# Altium PCB PCB2.PcbDoc
Units mil, origin at the board's own origin, x right, y up, seen from the top; angles counter-clockwise.
Board outline 1660 x 3715 mil, 2 copper layers (Top Layer, Bottom Layer); 35 components, 49 nets, 166 pads, 51 vias.
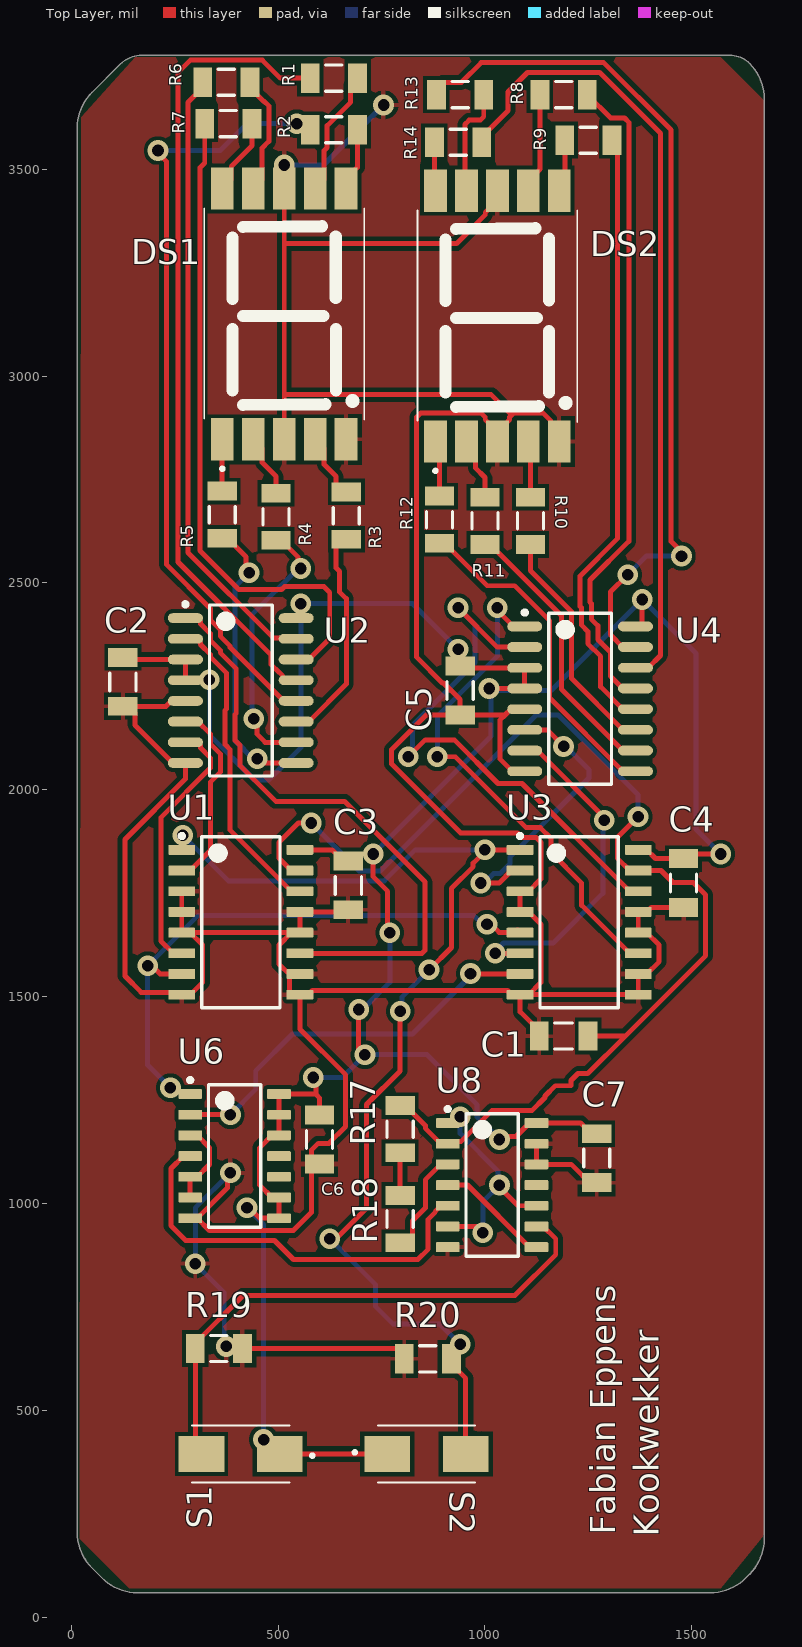
[diagram p0: Top Layer view]
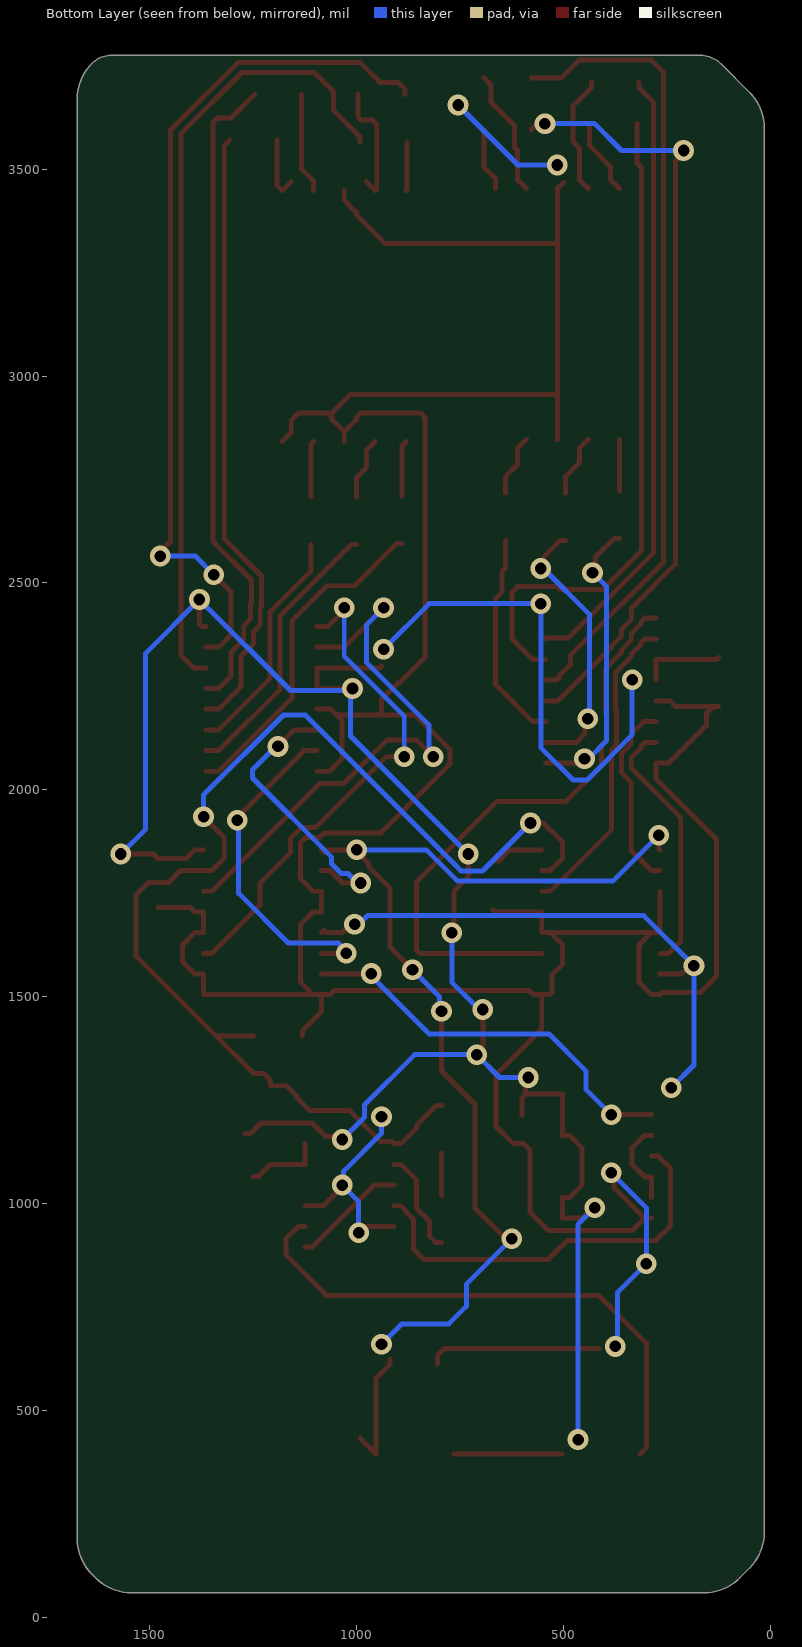
[diagram p1: Bottom Layer view, seen from below]

## Layer stack, top to bottom
Top Solder: solder mask 0.4, Solder Resist, Dk 3.5
Top Layer: signal copper 1.4
Dielectric 1: dielectric 12.6, FR-4, Dk 4.8
Bottom Layer: signal copper 1.4
Bottom Solder: solder mask 0.4, Solder Resist, Dk 3.5

## Board outline
15,205 ccw(c135.71,205) 50.36,119.64 74.64,95.36 ccw(c160,180.71) 160,60 1545,60 ccw(c1545,180.71) 1630.36,95.36 1639.64,104.64 ccw(c1554.29,190) 1675,190 1675,3670 ccw(c1554.29,3670) 1639.64,3755.36 ccw(c1592.22,3707.93) 1592.22,3775 170,3775 ccw(c170,3702.57) 118.79,3753.79 50.36,3685.36 ccw(c135.71,3600) 15,3600

## Design rules (kind name [scope] priority, off if disabled: settings)
Clearance [All] p1: gap=10 ignorepadtopadclearanceinfootprint=FALSE except(12: Arc-Arc Arc-Track Arc-SMDPad Arc-THPad Arc-Fill Arc-Poly Arc-Region Arc-Text Arc-Hole Track-Track Track-SMDPad Track-THPad Track-Fill Track-Poly Track-Region Track-Text Track-Hole)
PolygonConnect [All] p1: connectstyle=Relief reliefconductorwidth=10 reliefentries=4 polygonreliefangle="90 Angle" airgapwidth=10
RoutingVias [All] p1: holewidth=28 width=50 viastyle="Through Hole" minholewidth=28 minwidth=50 maxholewidth=28 maxwidth=50
SolderMaskExpansion [All] p1: expansion=4 istentingtop=FALSE
SupplyNets "Schematic Supply Nets_1" [InNet('Vdd')] p1: voltage=0.000
SupplyNets "Schematic Supply Nets" [InNet('GND')] p2: voltage=0.000
Width [All] p1: maxlimit=12 minlimit=12 preferedwidth=12 minimp=50.000000 maximp=50.000000 favimp=50.000000
30 further rules are at their usual default settings.

## Classes and differential pairs
component class Logic: C1 C3 C4 C6 C7 R17 R18 R19 R20 S1 S2 U1 U3 U6 U8
component class Display: C2 C5 DS1 DS2 R1 R2 R3 R4 R5 R6 R7 R8 R9 R10 R11 R12 R13 R14 U2 U4

## Components (designator, comment, footprint, x,y, rotation, side; value= is the part's Value field where it differs from the comment)
C1 "100µF" C1206 1190,1405 r180 top
C2 "100nF" C1206 125,2260.94 r90 top
C3 "100nF" C1206 670,1769.06 r270 top
C4 "100nF" C1206 1480,1775 r270 top
C5 "100nF" C1206 940,2240 r90 top
C6 "100nF" C1206 600,1155 r90 top
C7 "100nF" C1206 1270,1110 r90 top
DS1 "HDSM-433C" HDSM433C 515,3150 r0 top
DS2 "HDSM-433C" HDSM433C 1030,3145 r0 top
R1 "330" R1206 635,3720 r0 top
R2 "330" R1206 635,3595 r0 top
R3 "330" R1206 665,2662.91 r90 top
R4 "330" R1206 495,2660 r90 top
R5 "330" R1206 365,2665 r90 top
R6 "330" R1206 375,3710 r0 top
R7 "330" R1206 380,3610 r0 top
R8 "330" R1206 1190,3680 r180 top
R9 "330" R1206 1250,3570 r180 top
R10 "330" R1206 1110,2650 r90 top
R11 "330" R1206 1000,2650 r90 top
R12 "330" R1206 890,2652.91 r90 top
R13 "330" R1206 940,3680 r0 top
R14 "330" R1206 935,3565 r180 top
R17 "1K" R1206 795,1180 r90 top
R18 "1K" R1206 795,962.91 r90 top
R19 "10K" R1206 357.09,650 r0 top
R20 "10K" R1206 862.09,625 r180 top
S1 "START" 1478731 423.27,395 r180 top
S2 "PRESET" 1478731 845,395 r0 top
U1 "CD4510BNSR" NS0016A_N 410,1680 r0 top
U2 "CD4511BNSR" TI-NS16_N 410,2240 r0 top
U3 "CD4510BNSR" NS0016A_N 1227.72,1680 r0 top
U4 "CD4511BNSR" TI-NS16_N 1230,2220 r0 top
U6 "CD4001" D0014A_N 395,1115 r0 top
U8 "CD4093BM" D0014A_N 1017.28,1045 r0 top

## Footprints (in the part's own frame and the unit in brackets; to place one, negate y for a bottom-side part, rotate by r counter-clockwise, add the part's x,y. Pads: shape width x height; smd on the part's side, far side on the other; paste and mask are expansions set on the pad)
1478731 [mm]
  rect 2.8x2.2 smd: 1(-2.05,0) 2(2.75,0)
  silkscreen extent -4.15,-1.75 3.35,1.75, body extent -3.15,-1.75 3.65,1.75, height 5.2
C1206 [mm] "Chip Capacitor, Body 3.2x1.6mm, Height 1.7mm, IPC Medium Density"
  rect 1.15x1.8 smd: 1(-1.5,0) 2(1.5,0)
  silkscreen extent -0.55,-0.8 0.55,0.8, body extent -1.7,-0.9 1.7,0.9, height 1.7
D0014A_N [mm] "SOIC, 14-Leads, Body 8.75x4mm, Pitch 1.27mm, IPC Medium Density"
  rrect17% 1.45x0.6 smd: 1(-2.725,3.81) 2(-2.725,2.54) 3(-2.725,1.27) 4(-2.725,0) 5(-2.725,-1.27) 6(-2.725,-2.54) 7(-2.725,-3.81) 8(2.725,-3.81) 9(2.725,-2.54) 10(2.725,-1.27) 11(2.725,0) 12(2.725,1.27) 13(2.725,2.54) 14(2.725,3.81)
  silkscreen extent -2.85,-4.38 1.6,4.78, body extent -3.02,-4.32 3.02,4.32, height 1.59
HDSM433C [mm]
  rect 1.4x2.6 smd: 1(-3.8,-7.7) 2(-1.9,-7.7) 3(0,-7.7) 4(1.9,-7.7) 5(3.8,-7.7) 6(3.8,7.7) 7(1.9,7.7) 8(0,7.7) 9(-1.9,7.7) 10(-3.8,7.7)
  silkscreen extent -4.9,-9.6 4.9,6.5, body extent -4.95,-6.48 4.95,6.48, height 3.75
NS0016A_N [mm] "SOIC,16-Leads,Body 10.5x5.6mm,Pitch 1.27mm,IPC Medium Density"
  rrect17% 1.65x0.6 smd: 1(-3.625,4.445) 2(-3.625,3.175) 3(-3.625,1.905) 4(-3.625,0.635) 5(-3.625,-0.635) 6(-3.625,-1.905) 7(-3.625,-3.175) 8(-3.625,-4.445) 9(3.625,-4.445) 10(3.625,-3.175) 11(3.625,-1.905) 12(3.625,-0.635) 13(3.625,0.635) 14(3.625,1.905) 15(3.625,3.175) 16(3.625,4.445)
  silkscreen extent -3.75,-5.25 2.4,5.42, body extent -2.8,-5.25 2.8,5.25, height 2
R1206 [mm] "Chip Resistor, Body 3.2x1.6mm, IPC Medium Density"
  rect 1.15x1.8 smd: 1(-1.45,0) 2(1.45,0)
  silkscreen extent -0.5,-0.8 0.5,0.8, body extent -1.67,-0.87 1.67,0.87, height 0.75
TI-NS16_N [mm] "SOP, 16-Leads, Body 10.2x5.3mm, Pitch 1.27mm, IPC Medium Density"
  oval 2.15x0.6 smd: 1(-3.4,4.445) 2(-3.4,3.175) 3(-3.4,1.905) 4(-3.4,0.635) 5(-3.4,-0.635) 6(-3.4,-1.905) 7(-3.4,-3.175) 8(-3.4,-4.445) 9(3.4,-4.445) 10(3.4,-3.175) 11(3.4,-1.905) 12(3.4,-0.635) 13(3.4,0.635) 14(3.4,1.905) 15(3.4,3.175) 16(3.4,4.445)
  silkscreen extent -3.52,-5.25 1.92,5.42, body extent -2.8,-5.25 2.8,5.25, height 2

## Part data
C1 C2 C3 C4 C5 C6 C7: library part Capacitor_1206, "SMD Capacitor 1206", LatestRevisionDate=03-11-2016, LatestRevisionNote=Creation, PackageDescription="Chip Capacitor, Body 3.2x1.6mm, Height 1.7mm, IPC Medium Density", PackageReference=C1206, Published=03-11-2016, Publisher=Windesheim
DS1 DS2: "Display", Manufacturer_Name="Avago Technologies", Mouser Part Number=630-HDSM-433C, RS Part Number=1783057, Datasheet Link=https://docs.broadcom.com/docs/AV02-0708EN, Height=4mm, Manufacturer_Part_Number=HDSM-433C, Mouser Price/Stock=https://www.mouser.com/Search/Refine.aspx?Keyword=630-HDSM-433C, RS Price/Stock=http://uk.rs-online.com/web/p/products/1783057
R1 R2 R3 R4 R5 R6 R7 R8 R9 R10 R11 R12 R13 R14 R17 R18 R19 R20: library part Resistor_1206, "SMD Resistor 1206", LatestRevisionDate=03-11-2016, LatestRevisionNote=Creation, PackageDescription="Chip Resistor, Body 3.2x1.6mm, IPC Medium Density", PackageReference=R1206, Published=03-11-2016, Publisher=Windesheim
S1 S2: library part Switch, "Switch", Manufacturer_Name="TE Connectivity", Manufacturer_Part_Number=147873-1, Mouser Part Number=506-147873-1, Datasheet Link=https://componentsearchengine.com/Datasheets/1/147873-1.pdf, Height=5mm, Mouser Price/Stock=https://www.mouser.com/Search/Refine.aspx?Keyword=506-147873-1
U1 U3: "CMOS Presettable BCD Up/Down Counter, NS0016A, LARGE T&R", F @ Nom Voltage(Max)(Mhz)=8, Generic Part Number=CD4510B, ICC @ Nom Voltage(Max)(mA)=0.03, Manufacturer="Texas Instruments", Operating Temperature Range(C)="-55 to 125", Rating=Catalog, tpd @ Nom Voltage(Max)(ns)=200, Voltage(Nom)(V)=5,10,15, Bits(#)=4, DatasheetVersion=SCHS071B, Function=Counter, Input Type=CMOS, Inputs=1, Output Drive (IOL/IOH)(Max)(mA)=1.5/-1.5, Output Type=CMOS, PackageReference=NS0016A, Schmitt Trigger=No, Technology Family=CD4000, Type=Other, VCC(Max)(V)=18, VCC(Min)(V)=3
U2 U4: "CMOS BCD-to-7-Segment LED Latch / Decoder / Driver, 3 to 18 V, -55 to 125 degC, 16-pin SOP (NS16), Green (RoHS & no Sb/Br)", Manufacturer="Texas Instruments", Rating=Military, ComponentLink1Description="Manufacturer URL", ComponentLink1URL=http://www.ti.com/, ComponentLink2Description=Datasheet, ComponentLink2URL=http://www.ti.com/general/docs/lit/getliterature.tsp?genericPartNumber=CD4511B&fileType=pdf, ComponentLink3Description="Package Specification", ComponentLink3URL=http://www.ti.com/litv/pdf/msop002a, DatasheetVersion=SCHS072B, Eco-Plan="Green (RoHS & no Sb/Br)", Mounting Technology="Surface Mount", PackageDescription="16-Pin Plastic Small Outline, Body 10.20 x 5.30 mm, Pitch 1.27 mm", PackageReference=NS16, PackageVersion=4040062/C, PartNumber=CD4511BNSR, SubFamily="Discrete Segment LED Driver", Vin(Max)(V)=18, Vin(Min)(V)=3
U6: "CMOS Quad 2-Input NOR Schmitt Triggers, D0014A, TUBE", F @ Nom Voltage(Max)(Mhz)=8, Generic Part Number=CD4093B, ICC @ Nom Voltage(Max)(mA)=0.06, Manufacturer="Texas Instruments", Operating Temperature Range(C)="-55 to 125", Rating=Catalog, Voltage(Nom)(V)=10, Bits(#)=4, Code_JEDEC=MS-012, DatasheetVersion=SCHS115D, Input Type=CMOS, Output Drive (IOL/IOH)(Max)(mA)=1.5/-1.5, Output Type=CMOS, PackageReference=D0014A, Schmitt Trigger=Yes, Technology Family=CD4000, VCC(Max)(V)=18, VCC(Min)(V)=3
U8: "CMOS Quad 2-Input NAND Schmitt Triggers, D0014A, TUBE", F @ Nom Voltage(Max)(Mhz)=8, Generic Part Number=CD4093B, ICC @ Nom Voltage(Max)(mA)=0.06, Manufacturer="Texas Instruments", Operating Temperature Range(C)="-55 to 125", Rating=Catalog, Voltage(Nom)(V)=10, Bits(#)=4, Code_JEDEC=MS-012, DatasheetVersion=SCHS115D, Input Type=CMOS, Output Drive (IOL/IOH)(Max)(mA)=1.5/-1.5, Output Type=CMOS, PackageReference=D0014A, Schmitt Trigger=Yes, Technology Family=CD4000, VCC(Max)(V)=18, VCC(Min)(V)=3

## Via types
v1: diameter 50, hole 28, Top Layer to Bottom Layer, 51 vias

## Nets (pads, with @x,y where several pads share a name; then routed paths per layer and width w, separated by ;. In a path a pad name is that pad's centre, name@x,y a point inside that pad or via, vN(x,y) a via of type N, cw(c..) or ccw(c..) an arc to the next point about the centre after c; other vN are vias at no path point)
CarryM: U3.7 U6.2 | length 968.8
  Top Layer w12: U6.2 v1(385,1215) ; v1(965,1556) 965.5,1555.5 1084.5,1555.5 U3.7
  Bottom Layer w12: v1(385,1215) 446.14,1276.14 446.14,1321.14 535,1410 825,1410 965,1550 v1(965,1556)
CarryOUT: U1.7 U3.5 U6.1 | length 1379.6
  Top Layer w12: v1(185,1575) 195.28,1575 215.28,1555 U1.7 ; v1(1005,1675) 1015.28,1675 1034.52,1655.76 1074.14,1655.76 1079.19,1660.81 U3.5
  Bottom Layer w12: v1(240,1280) 185,1335 v1(185,1575) 306,1696 973.72,1696 994.72,1675 v1(1005,1675)
Clock: C1.1 R17.2 U1.15 U3.15 U8.2 | length 2896.4
  Top Layer w12: U1.15 532.05,1805 502.24,1834.81 502.24,1873.09 549.15,1920 v1@565,1920 ; R17.2 807.8,1237.09 855.94,1188.94 855.94,1182.32 893.27,1145 U8.2 915.81,1150.81 942.75,1150.81 1016.75,1224.81 1113.34,1224.81 1145.05,1256.52 1145.05,1260.05 1170,1285 1208.11,1285 1208.11,1297.8 1224.75,1314.43 1248.44,1314.43 1339,1405 ; C1.1 1339,1405 ; v1(1370,1935) 1319.95,1884.95 1319.95,1834.81 1349.76,1805 U3.15 1425.53,1805 1454.41,1776.12 1503.35,1776.12 1533.43,1746.04 1533.43,1599.43 1339,1405
  Bottom Layer w12: v1(580,1920) 696,1804 746.98,1804 1123.98,2181 1176.98,2181 1370,1987.98 v1(1370,1935)
GND: C1.2 C2.1 C3.2 C4.2 C5.1 C6.1 C7.1 DS1.3 DS1.5 DS1.8 DS2.3 DS2.5 DS2.8 R19.2 R20.2 U1.3 U1.4 U1.5 U1.8 U1.9 U1.10 U1.12 U1.13 U2.5 U2.8 U3.3 U3.4 U3.8 U3.9 U3.10 U3.12 U3.13 U4.5 U4.8 U6.7 U8.7 U8.12 U8.13 | length 10342.3
  Top Layer w12: C2.1 C2.1@137.8,2201.89 ; U1.3 U1.4 U1.5 U1.5@287.95,1655 ; U2.5 242.48,2215 229.37,2201.89 C2.1@137.8,2201.89 ; U6.7 U6.7@304.45,965 ; v1(385,1075) 377.73,1067.73 377.73,1038.28 U6.7@304.45,965 ; R19.2 788.36,650 805,633.36 R20.2 R20.2@805,612.2 ; DS1.8@499.95,3468.2 DS1.8 515,3320 ; DS1.3 515,2955 ; C3.2 665,1705 U1.13 U1.12 U1.12@532.05,1655 ; DS2.3 DS2.3@1030,2865.47 ; DS2.8 1030,3424.53 1000.76,3395.28 1000.76,3389.51 931.24,3320 515,3320 ; U4.8 1065.63,2045 1035.82,2074.81 1035.82,2168.33 1048.43,2180.94 ; U4.5 1062.48,2195 1048.43,2180.94 ; U8.13 U8.12 1208.15,1095 1237.2,1065.94 C7.1@1250,1065.94 ; C1.2 1130.94,1417.8 1085,1463.74 U3.8 ; DS2.5 1158.05,2863.41 1158.05,2892.8 1139.82,2911.03 1069.79,2911.03 1064.52,2905.76 ; C4.2 1402.05,1715.94 1391.1,1705 U3.13 U3.12 1391.1,1655 1420.91,1625.19 1420.91,1584.81 1391.1,1555 U3.10 U3.9 U3.8@1105.67,1505 ; C2.1@137.8,2201.89 154.43,2185.25 154.43,2156.2 245.63,2065 U2.8 276.14,2026.27 130,1880.13 130,1550 169.19,1510.81 261.47,1510.81 U1.8 287.95,1505 317.76,1534.81 317.76,1625.19 U1.5@287.95,1655 ; U1.5@287.95,1655 U1.12@532.05,1655 ; U6.7@304.45,965 334.26,935.19 537.11,935.19 580.57,978.65 580.57,1129.31 597.2,1145.94 622.8,1145.94 663.43,1186.58 663.43,1311.22 552.72,1421.93 U1.9 ; 515,2955 1015.28,2955 1064.52,2905.76 ; 515,2955 515,3320 ; U1.12@532.05,1655 502.24,1625.19 502.24,1578.95 528.24,1552.94 528.24,1510.81 534.06,1505 U1.9 ; U1.9 573.39,1505 583.39,1515 1054.33,1515 1064.33,1505 U3.8 ; C5.1 857.96,2180.94 774,2096.98 774,2063.02 941.02,1896 1078.63,1896 1089.82,1884.81 1123.76,1884.81 1135.48,1873.09 1135.48,1784.81 1105.67,1755 U3.3 U3.4 1105.67,1705 1135.48,1675.19 1135.48,1534.81 U3.8@1105.67,1505 ; C5.1 940,2218.42 900,2258.42 897.11,2258.42 834.83,2320.69 834.83,2900.49 845.38,2911.03 990.21,2911.03 1000.76,2900.49 1000.76,2894.72 DS2.3@1030,2865.47 ; C5.1 1048.43,2180.94 ; DS2.3@1030,2865.47 1059.24,2894.72 1059.24,2900.49 1064.52,2905.76 ; U3.8 U3.8@1105.67,1505
  Bottom Layer w12: v1(375,655) 370,660 370,785 v1(300,855) 300,990 v1(385,1075) ; v1(515,3510) 610,3510 v1(755,3655) 744.72,3655 v1@742.22,3652.5
NetDS1_1: DS1.1 R5.2 | length 124.9
  Top Layer w12: R5.2 365,2846.46 DS1.1
NetDS1_2: DS1.2 R4.2 | length 152.5
  Top Layer w12: DS1.2 461.76,2825.29 461.76,2790.97 495,2757.72 R4.2
NetDS1_4: DS1.4 R3.2 | length 150.6
  Top Layer w12: DS1.4 611.36,2825.29 611.36,2786.36 640,2757.72 R3.2@640,2717.09
NetDS1_6: DS1.6 R2.2 | length 153.2
  Top Layer w12: DS1.6 664.61,3476.77 692.09,3504.25 R2.2
NetDS1_7: DS1.7 R1.2 | length 309.2
  Top Layer w12: DS1.7 611.36,3474.71 611.36,3544.92 618.55,3552.11 618.55,3604.99 675.45,3661.89 675.45,3703.36 R1.2
NetDS1_9: DS1.9 R6.2 | length 292.1
  Top Layer w12: R6.2 432.09,3697.2 465.7,3663.6 467.02,3663.6 477.72,3652.89 477.72,3567.11 461.76,3551.14 461.76,3474.71 DS1.9
NetDS1_10: DS1.10 R7.2 | length 186.5
  Top Layer w12: DS1.10 386.95,3474.71 386.95,3506.43 437.09,3556.57 R7.2
NetDS2_1: DS2.1 R12.2 | length 135.8
  Top Layer w12: DS2.1 890,2832.24 R12.2
NetDS2_2: DS2.2 R11.2 | length 153.3
  Top Layer w12: DS2.2 976.76,2820.29 976.76,2778.24 1000,2755 R11.2
NetDS2_4: DS2.4 R10.2 | length 136.9
  Top Layer w12: DS2.4 1110,2836.65 R10.2
NetDS2_6: DS2.6 R9.2 | length 157.9
  Top Layer w12: DS2.6@1158.05,3469.71 DS2.6 1192.91,3461.46 R9.2
NetDS2_7: DS2.7 R8.2 | length 243.5
  Top Layer w12: DS2.7 1104.8,3471.77 1132.91,3499.88 R8.2
NetDS2_9: DS2.9 R13.2 | length 298.6
  Top Layer w12: DS2.9@976.76,3469.71 DS2.9 951.45,3451.9 951.45,3607.89 961.99,3618.43 988.95,3618.43 997.09,3626.57 R13.2
NetDS2_10: DS2.10 R14.2 | length 117.9
  Top Layer w12: R14.2 877.91,3450.63 DS2.10
NetR1_1: R1.1 U2.13 | length 1953.3
  Top Layer w12: U2.13 516.49,2265 511.12,2270.37 511.12,2275.38 501.32,2285.19 501,2285.19 483.54,2302.65 483.54,2325.32 258.28,2550.58 258.28,3733.89 287.82,3763.43 462.18,3763.43 505.61,3720 R1.1
NetR2_1: R2.1 U2.12 | length 1878.3
  Top Layer w12: v1(210,3545) 210,3538.97 230,3518.97 230,2544.92 336.46,2438.45 336.46,2411.29 360.46,2387.29 360.46,2371.23 384.46,2347.23 384.46,2343.88 513.35,2215 U2.12 ; v1(545,3610) 562.91,3610 R2.1
  Bottom Layer w12: v1@220,3542.45 222.55,3545 360,3545 425,3610 v1(545,3610)
NetR3_1: R3.1 U2.11 | length 516.3
  Top Layer w12: U2.11 574.37,2165 665,2255.63 665,2461.91 649,2477.91 649,2527.59 640,2536.59 R3.1@640,2602.91
NetR4_1: R4.1 U2.10 | length 661.3
  Top Layer w12: v1(441.42,2171.81) 448.69,2164.54 448.69,2135.21 468.9,2115 U2.10 ; R4.1 507.8,2602.91 547.73,2562.98 547.73,2542.27 v1(555,2535)
  Bottom Layer w12: v1(441.42,2171.81) 436.81,2176.42 436.81,2423.32 548.49,2535 v1(555,2535)
NetR5_1: R5.1 U2.9 | length 707.8
  Top Layer w12: R5.1 377.8,2607.91 422.73,2562.98 422.73,2532.27 v1(430,2525) ; v1(449.46,2075.54) 459.75,2075.54 470.28,2065 U2.9
  Bottom Layer w12: v1(430,2525) 395.81,2490.81 395.81,2119.19 439.46,2075.54 v1(449.46,2075.54)
NetR6_1: R6.1 U2.15 | length 1499.4
  Top Layer w12: R6.1 317.91,3697.2 282.28,3661.57 282.28,2573.17 488.22,2367.22 541.63,2367.22 U2.15
NetR7_1: R7.1 U2.14 | length 1611.3
  Top Layer w12: R7.1 322.91,3514.87 311.57,3503.52 311.57,2577.82 405.39,2484 508.49,2484 515.49,2491 610.97,2491 625,2476.97 625,2365.63 574.37,2315 U2.14
NetR8_1: R8.1 U4.13 | length 1598.5
  Top Layer w12: R8.1 1303.65,3623.43 1337.18,3623.43 1347.72,3612.89 1347.72,2600.71 1254,2506.98 1254,2453.53 1257,2450.53 1257,2412.66 1272.83,2396.83 1272.83,2363.35 1303.54,2332.65 1303.54,2274.81 1333.35,2245 U4.13
NetR9_1: R9.1 U4.12 | length 1490.9
  Top Layer w12: R9.1 1320,3557.09 1320,2606.92 1230,2516.92 1230,2443.59 1233,2440.59 1233,2398.69 1248.83,2382.86 1248.83,2353.41 1279.54,2322.71 1279.54,2248.81 1333.35,2195 U4.12
NetR10_1: R10.1 U4.11 | length 570.9
  Top Layer w12: R10.1 1110,2529.65 1209,2430.65 1209,2269.35 1333.35,2145 U4.11
NetR11_1: R11.1 U4.10 | length 674
  Top Layer w12: R11.1 1012.8,2592.91 1185,2420.71 1185,2243.35 1333.35,2095 U4.10
NetR12_1: R12.1 U4.9 | length 811.7
  Top Layer w12: R12.1 902.8,2595.83 1005.35,2493.27 1071.73,2493.27 1156.46,2408.54 1156.46,2232.65 1156.05,2232.24 1156.05,2222.3 1333.35,2045 U4.9
NetR13_1: R13.1 U4.15 | length 2097.7
  Top Layer w12: R13.1 882.91,3692.8 899.55,3709.43 942.99,3709.43 990.99,3757.43 1287.12,3757.43 1450,3594.55 1450,2600.28 1475,2575.28 v1(1475,2565) ; v1(1345,2520) 1303.54,2478.54 1303.54,2374.81 1333.35,2345 U4.15
  Bottom Layer w12: v1(1345,2520) 1390,2565 v1(1475,2565)
NetR14_1: R14.1 U4.14 | length 1930.8
  Top Layer w12: R14.1 992.09,3577.8 1055.77,3641.48 1055.77,3686.39 1102.82,3733.43 1277.18,3733.43 1424.18,3586.43 1424.18,2324.81 1394.37,2295 U4.14
NetR17_1: R17.1 R18.2 | length 102.9
  Top Layer w12: R18.2 R17.1
NetR18_1: R18.1 U8.3 | length 254.1
  Top Layer w12: R18.1 807.8,905.83 824.43,922.46 824.43,958.01 855.94,989.52 855.94,1057.68 893.27,1095 U8.3
NetU1_2: U1.2 U2.6 | length 463.5
  Top Layer w12: U1.2 287.95,1805 336.46,1853.51 336.46,2018.71 360.46,2042.71 360.46,2087.29 336.46,2111.29 336.46,2135.19 306.65,2165 U2.6
NetU1_6: U1.6 U2.7 | length 633.6
  Top Layer w12: U1.6 246.61,1605 216.8,1634.81 216.8,1932.99 336.46,2052.65 336.46,2063.73 336.46,2077.35 312.46,2101.35 312.46,2106.04 303.51,2115 U2.7
NetU1_11: U1.11 U2.1 | length 1463.8
  Top Layer w12: U2.1 303.51,2415 312.46,2406.04 312.46,2401.35 336.46,2377.35 336.46,2361.29 360.46,2337.29 360.46,2331.46 399,2292.92 399,2185.09 395.81,2181.9 395.81,2119.83 408.46,2107.17 408.46,2058.55 494.75,1972.27 660.72,1972.27 855,1777.98 855,1612.03 847.97,1605 U1.11
NetU1_14: U1.14 U2.2 | length 755.3
  Top Layer w12: U2.2 303.51,2365 312.46,2356.04 312.46,2351.35 336.46,2327.35 336.46,2321.52 375,2282.98 375,2195.03 371.81,2191.84 371.81,2109.89 384.46,2097.23 384.46,1902.58 532.05,1755 U1.14
NetU3_2: U3.2 U4.6 | length 698.9
  Top Layer w12: v1(990,1775) 1034.33,1775 1064.33,1805 U3.2 ; U4.6 1150.42,2145 1190,2105.42 v1(1190,2105)
  Bottom Layer w12: v1(990,1775) 997.98,1775 1020.98,1798 1036.98,1798 1061,1822.02 1061,1838.02 1251.52,2028.54 1251.52,2048.48 1195,2105 v1(1190,2105)
NetU3_6: U3.6 U4.7 | length 816.8
  Top Layer w12: v1(1025,1605) U3.6 ; U4.7 1129.8,2095 1129.8,2091.86 1288.56,1933.09 v1(1288.56,1926.79)
  Bottom Layer w12: v1@1030,1615 1045,1630 1165,1630 1285,1750 1285,1923.23 v1(1288.56,1926.79)
NetU3_11: U3.11 U4.1 | length 1242.1
  Top Layer w12: v1(885,2080) 928.57,2080 1099.76,1908.81 1133.7,1908.81 1159.48,1883.03 1159.48,1849.09 1233.86,1774.71 1233.86,1720.91 1349.76,1605 U3.11 ; v1(1030,2440) 1030,2433.77 1068.77,2395 U4.1
  Bottom Layer w12: v1(885,2080) 885,2177.98 1030,2322.98 v1(1030,2440)
NetU3_14: U3.14 U4.2 | length 1369
  Top Layer w12: v1(815,2080) 856,2121 925.89,2121 1031.7,2015.19 1089.57,2015.19 1349.76,1755 U3.14 ; v1(935,2440) 1030,2345 U4.2
  Bottom Layer w12: v1@825,2075 825,2156.36 976,2307.36 976,2399 v1(935,2440)
NetU6_3: U6.3 U6.5 U6.6 | length 208.2
  Top Layer w12: U6.6 U6.5 304.45,1065 334.26,1094.81 334.26,1135.19 304.45,1165 U6.3
NetU6_4: U6.4 U8.5 | length 997.2
  Top Layer w12: U6.4 270.98,1115 241.17,1085.19 241.17,946.91 276.89,911.19 491.46,911.19 537.46,865.19 837.89,865.19 862.67,889.97 862.67,962.31 879.94,979.58 879.94,981.68 893.27,995 U8.5
NetU8_4: U8.4 U8.8 | length 276.7
  Top Layer w12: U8.4 957.83,1045 1107.83,895 U8.8
PRESET: R20.1 S2.2 U1.1 U3.1 | length 2763.2
  Top Layer w12: U1.1 270,1857.72 v1(270,1890) ; v1@640,915 713.86,988.86 713.86,1239.48 795,1320.61 v1(795,1465) ; v1(865,1565) 919.01,1619.01 919.01,1761.99 971.36,1814.34 971.36,1822.83 1000,1851.47 v1(1000,1855) 1073.38,1855 1079.19,1849.19 U3.1 ; R20.1 919.17,612.2 953.27,578.11 S2.2 S2.2@990.57,432.31
  Bottom Layer w12: v1(270,1890) 380,1780 756.92,1780 831.92,1855 v1(1000,1855) ; v1(625,915) 735,805 735,752.03 777.38,709.65 890.35,709.65 v1(940,660) ; v1@800,1470 800,1500 v1(865,1565)
START: R19.1 S1.2 U8.9 | length 1331
  Top Layer w12: S1.2 300,410 R19.1 300,662.8 415.38,778.17 1072.37,778.17 1171.11,876.91 1171.11,915.19 1141.3,945 U8.9
STOP: U8.1 U8.6 U8.10 | length 505
  Top Layer w12: U8.6 v1@985,945 ; v1@1045,1030 1080,995 U8.10
  Bottom Layer w12: v1(940,1210) 940,1170 1031.59,1078.41 1031.59,1048.41 v1(1035,1045) 995,1005 v1(995,930)
Vdd: C2.2 C3.1 C4.1 C5.2 C6.2 C7.2 S1.1 S2.1 U1.16 U2.3 U2.4 U2.16 U3.16 U4.3 U4.4 U4.16 U6.8 U6.9 U6.12 U6.13 U6.14 U8.14 | length 6610.2
  Top Layer w12: C2.2 130,2315 U2.3 U2.4 ; v1(425,990) 430.74,990 455.74,965 U6.8 U6.9 485.55,1015 455.74,1044.81 455.74,1135.19 485.55,1165 U6.12 U6.13 U6.14 592.27,1265 ; S1.1 S2.1 ; U1.16 630.31,1855 657.2,1828.11 C3.1 ; v1(585,1305) 592.27,1297.73 592.27,1265 ; C6.2 600,1255.94 592.27,1263.67 592.27,1265 ; v1@695,1365 v1(695,1469.23) ; v1(730,1845) 730,1790 765,1755 v1@765,1650 ; C5.2 944.06,2295 U4.3 U4.4 v1(1010,2245) ; v1(1035,1155) 1042.27,1162.27 1075.11,1162.27 1107.83,1195 1231.26,1195 1257.2,1169.06 C7.2 ; U4.16 1374.63,2395 1380,2400.37 v1(1380,2460) ; U3.16 1391.1,1855 1412.05,1834.06 C4.1 1490.94,1845 v1(1570,1845)
  Bottom Layer w12: v1(334,2266) 335,2265 335,2132.02 443.02,2024 476.98,2024 555,2102.02 v1(555,2450) 825,2450 v1(935,2340) ; v1(425,990) 465,950 v1(465,430) ; v1(585,1305) 655,1305 v1(710,1360) 860,1360 981,1239 981,1209 v1(1035,1155) ; v1@715,1480 770,1535 v1(770,1655) ; v1(730,1845) 1015,2130 v1@1015,2240 ; v1(1010,2245) v1@1015,2240 ; v1(1570,1845) 1510,1905 1510,2330 v1(1380,2460) 1160,2240 v1@1015,2240
pads on no net: U6.10 U6.11 U8.11

## Polygon pours and split planes (outlines as drawn)
GND on Top Layer "GND_L01_P000" (solid, pour order 0): 155,3770 25,3625 20.32,190 140,70.32 1570,70.32 1675,200 1675,3665 1570,3770 185,3770

## Silkscreen, mask and mechanical layers (free items; w line width, h text height)
Top Overlay:
  text "Fabian Eppens" at 1315.01,200 h60 r90
  text "Kookwekker" at 1420,195 h60 r90
Mechanical 1:
  the board outline again, w10